# Altium PCB SensorPCB.PcbDoc
Units mil, origin at the board's own origin, x right, y up, seen from the top; angles counter-clockwise.
Board outline 3630 x 1710 mil, 2 copper layers (Top Layer, Bottom Layer); 23 components, 20 nets, 75 pads, 30 vias.
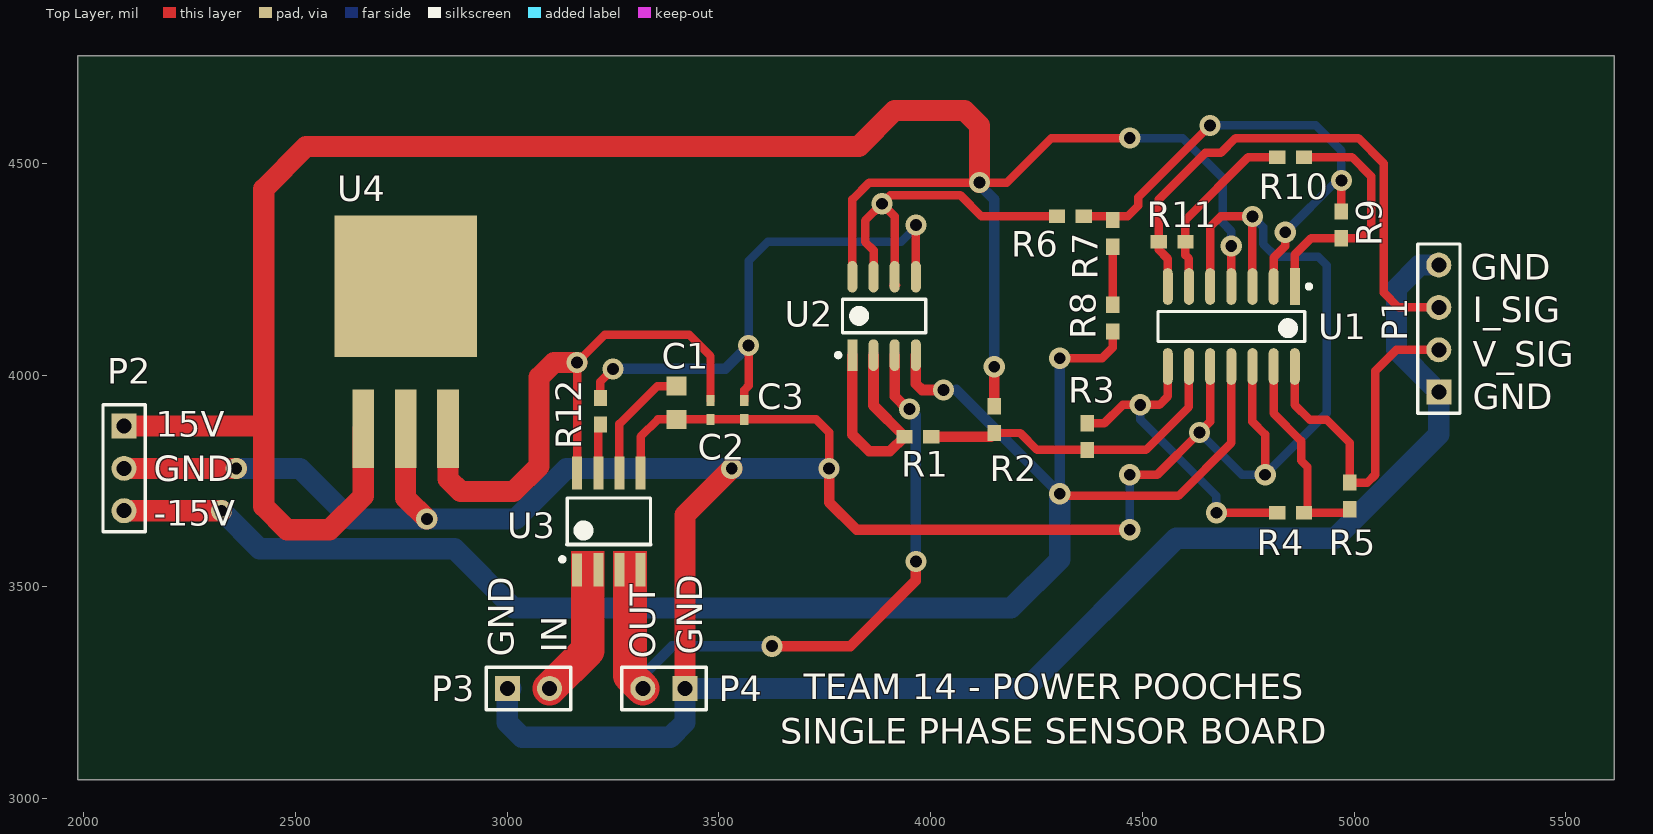
[diagram p0: Top Layer view]
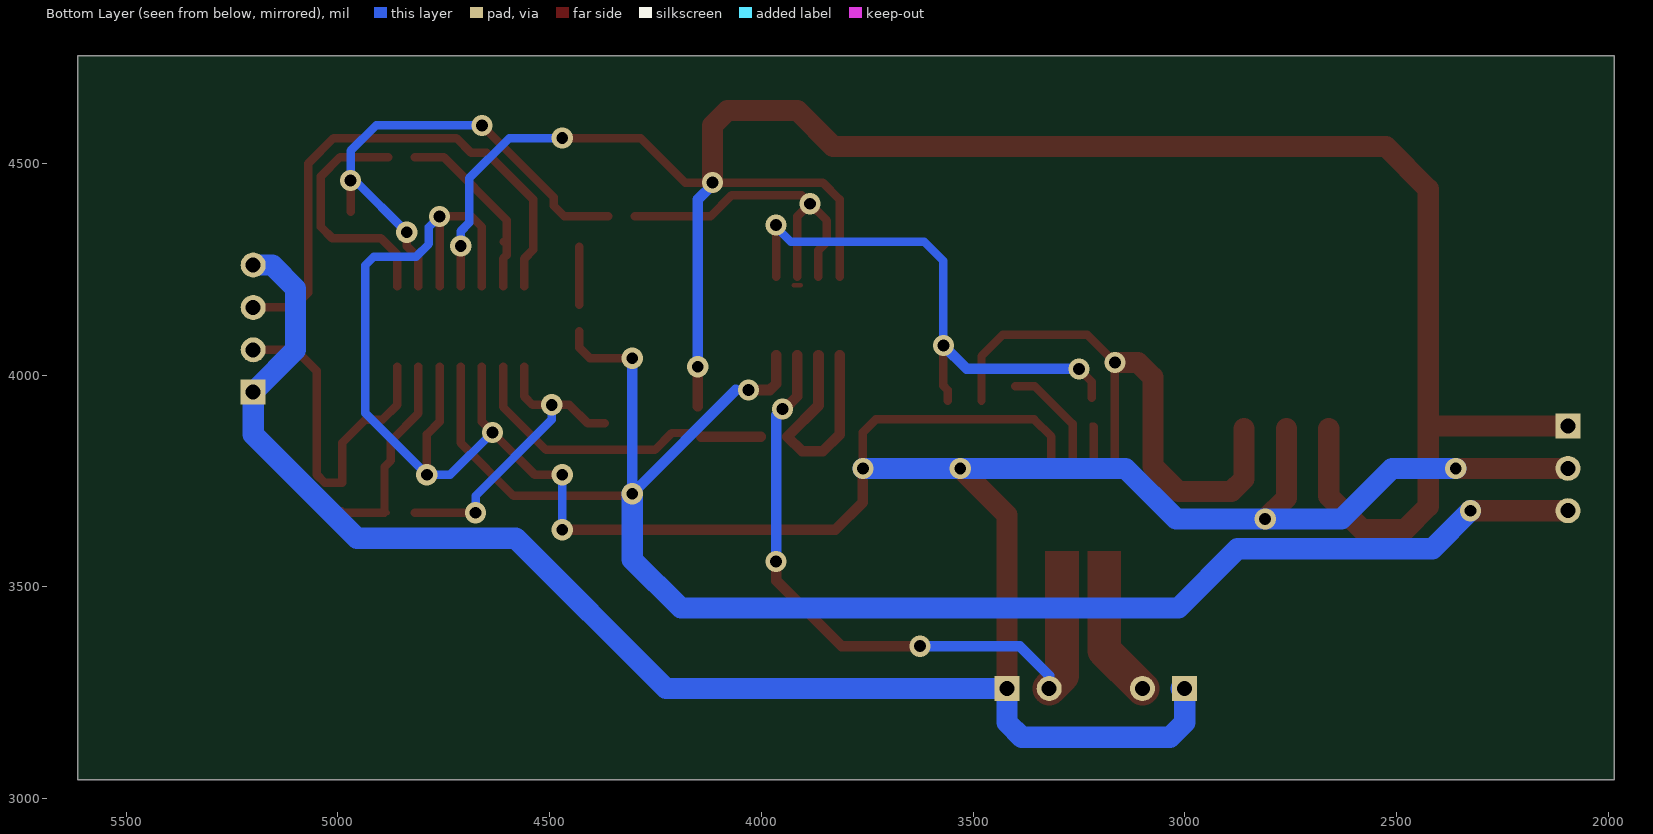
[diagram p1: Bottom Layer view, seen from below]

## Layer stack, top to bottom
Top Layer: signal copper 1.4
Dielectric: dielectric 12.6, FR-4, Dk 4.8
Bottom Layer: signal copper 1.4

## Board outline
1985,3045 5615,3045 5615,4755 1985,4755

## Design rules (kind name [scope] priority, off if disabled: settings)
Clearance [All] p1: gap=10
PolygonConnect [All] p1: connectstyle=Relief reliefconductorwidth=10 reliefentries=4 polygonreliefangle="90 Angle"
RoutingVias [All] p1: holewidth=28 width=50 viastyle="Through Hole" minholewidth=28 minwidth=50 maxholewidth=28 maxwidth=50
SilkscreenOverComponentPads [All] p1: minsilkscreentomaskgap=10
SolderMaskExpansion [All] p1: expansion=4
Width [All] p1: maxlimit=100 minlimit=10 preferedwidth=50
27 further rules are at their usual default settings.

## Components (designator, comment, footprint, x,y, rotation, side; value= is the part's Value field where it differs from the comment)
C1 "Cap Semi" CAP0805 3400,3935 r270 top
C2 "Cap Semi" CAP0402 3480,3920 r90 top
C3 "Cap Semi" CAP0402 3560,3920 r90 top
P1 "Header 4" HDR1X4 5200,3960 r90 top
P2 "Header 3" HDR1X3 2095,3880 r270 top
P3 "Header 2" HDR1X2 3000,3260 r0 top
P4 "Header 2" HDR1X2 3420,3260 r180 top
R1 "Res3" RESC1608X06N 3970,3855 r0 top
R2 "Res3" RESC1608X06N 4150,3895 r270 top
R3 "Res3" RESC1608X06N 4370,3855 r90 top
R4 "Res3" RESC1608X06N 4850,3675 r0 top
R5 "Res3" RESC1608X06N 4990,3715 r90 top
R6 "Res3" RESC1608X06N 4330,4375 r0 top
R7 "Res3" RESC1608X06N 4430,4335 r90 top
R8 "Res3" RESC1608X06N 4430,4135 r90 top
R9 "Res3" RESC1608X06N 4970,4355 r270 top
R10 "Res3" RESC1608X06N 4850,4515 r180 top
R11 "Res3" RESC1608X06N 4570,4315 r180 top
R12 "Res3" RESC1608X06N 3220,3915 r90 top
U1 "TL084D" D014_N 4710,4115 r270 top
U2 "TL082D" D008_L 3890,4140 r90 top
U3 "ACS712" SOIC127P620X175-8N 3240,3655 r90 top
U4 "LM2937-5.0" TO254P1258X464-4N 2760,4080 r90 top

## Footprints (in the part's own frame and the unit in brackets; to place one, negate y for a bottom-side part, rotate by r counter-clockwise, add the part's x,y. Pads: shape width x height; smd on the part's side, far side on the other; paste and mask are expansions set on the pad)
CAP0402 [mm] "Chip Capacitor 2-Leads, Body 1mm x .5mm, IPC Medium Density"
  rect 0.65x0.5 smd: 1(-0.635,0) 2(0.508,0)
CAP0805 [mm] "Chip Capacitor, 2-Leads, Body 2x1.25mm, IPC Medium Density"
  rect 1.14x1.2 smd: 1(-1,0) 2(1,0)
D008_L [mm] "SOIC, 8-Leads, Body 4.9x3.9mm, Pitch 1.27mm, IPC High Density"
  rect 1.9x0.6 smd: 1(-2.35,1.905)
  oval 1.9x0.6 smd: 2(-2.35,0.635) 3(-2.35,-0.635) 4(-2.35,-1.905) 5(2.35,-1.905) 6(2.35,-0.635) 7(2.35,0.635) 8(2.35,1.905)
  silkscreen extent -2.47,-2.5 1,2.88, body extent -2,-2.5 2,2.5, height 1.75
D014_N [mm] "SOIC, 14-Leads, Body 8.7x3.9mm, Pitch 1.27mm, IPC Medium Density"
  rect 2.2x0.6 smd: 1(-2.4,3.81)
  oval 2.2x0.6 smd: 2(-2.4,2.54) 3(-2.4,1.27) 4(-2.4,0) 5(-2.4,-1.27) 6(-2.4,-2.54) 7(-2.4,-3.81) 8(2.4,-3.81) 9(2.4,-2.54) 10(2.4,-1.27) 11(2.4,0) 12(2.4,1.27) 13(2.4,2.54) 14(2.4,3.81)
  silkscreen extent -2.52,-4.4 0.9,4.79, body extent -2,-4.38 2,4.38, height 1.75
HDR1X2 [mm] "Connector; Header; 2 Position"
  rect 1.5x1.5 hole 0.9: 1(0,0)
  round 1.5 hole 0.9: 2(2.54,0)
  silkscreen extent -1.27,-1.27 3.81,1.27
HDR1X3 [mm] "Connector; Header; 3 Position"
  rect 1.5x1.5 hole 0.9: 1(0,0)
  round 1.5 hole 0.9: 2(2.54,0) 3(5.08,0)
  silkscreen extent -1.27,-1.27 6.35,1.27
HDR1X4 [mm] "Connector; Header; 4 Position"
  rect 1.5x1.5 hole 0.9: 1(0,0)
  round 1.5 hole 0.9: 2(2.54,0) 3(5.08,0) 4(7.62,0)
  silkscreen extent -1.27,-1.27 8.89,1.27
RESC1608X06N [mm] "Chip Resistor, 2-Leads, Body 1.6x0.8mm, IPC Medium Density"
  rect 0.97x0.8 smd: 1(-0.8,0) 2(0.8,0)
SOIC127P620X175-8N [mm] "SOIC, 8-Leads, Body 5.0x4.0mm (max), Pitch 1.27mm, IPC Medium Density"
  rect 2x0.6 smd: 1(-2.921,1.905) 2(-2.9,0.635) 3(-2.9,-0.635) 4(-2.9,-1.905) 5(2.9,-1.905) 6(2.9,-0.635) 7(2.9,0.635) 8(2.9,1.905)
  silkscreen extent -2.41,-2.5 1.4,2.92
TO254P1258X464-4N [mm] "TO, 4-Pads, Body 8.9x10.4mm (max), IPC Medium Density"
  rect 4.7x1.3 smd: 1(-5.25,2.54) 2(-5.25,0) 3(-5.25,-2.54)
  rect 8.5x8.55 smd: 4(3.3,0)

## Part data
C1 C2 C3: "Capacitor (Semiconductor SIM Model)"
P1: "Header, 4-Pin"
P2: "Header, 3-Pin"
P3 P4: "Header, 2-Pin"
R1 R2 R3 R4 R5 R6 R7 R8 R9 R10 R11 R12: "Resistor"
U1 U2: "JFET-Input Operational Amplifier"
U4: "5V voltage regulator"

## Via types
v1: diameter 50, hole 28, Top Layer to Bottom Layer, 30 vias

## Nets (pads, with @x,y where several pads share a name; then routed paths per layer and width w, separated by ;. In a path a pad name is that pad's centre, name@x,y a point inside that pad or via, vN(x,y) a via of type N, cw(c..) or ccw(c..) an arc to the next point about the centre after c; other vN are vias at no path point)
5VIN: C2.2 U3.8 U4.3 | length 1413.5
  Top Layer w20: U3.8 v1(3165,4030) 3230,4095 3430,4095 3480,4045 C2.2
  Top Layer w50: U4.3 2860,3755 2890,3725 3015,3725 3075,3785 3075,3995 3110,4030 v1(3165,4030)
-VCC: P2.3 R8.1 U1.11 U2.4 | length 4149.2
  Top Layer w20: v1(4305,4040) 4405,4040 4430,4065 R8.1 ; v1@4310,3715 4585,3715 4710,3840 U1.11
  Top Layer w25: U2.4 3965,3980 3980,3965 v1(4030,3965)
  Top Layer w50: P2.3 v1(2325,3680)
  Bottom Layer w20: v1(4030,3965) 4060,3965
  Bottom Layer w25: 4060,3965 v1(4305,3720) v1(4305,4040)
  Bottom Layer w50: v1(2325,3680) 2415,3590 2875,3590 3015,3450 4190,3450 4305,3565 v1(4305,3720)
GND: C1.2 C2.1 C3.1 P1.1 P1.4 P2.2 P3.1 P4.1 U1.3 U1.5 U1.10 U1.12 U3.5 U4.2 | length 9392.9
  Top Layer w20: U3.5 3315,3855 3355.63,3895.63 C1.2 3729.69,3895.63 3760,3865.32 v1(3760,3780) ; v1(4470,3765) 4535,3765 v1(4635,3865) 4660,3890 U1.10 ; U1.5 4660,4350 4685,4375 v1(4760,4375) U1.3 U1.3@4760,4243.37 ; U1.12 4760,3890 4790,3860 v1(4790,3765)
  Top Layer w25: v1(3760,3780) 3760,3700 3825,3635 v1(4470,3635)
  Top Layer w50: P2.2 v1(2360,3780) ; U4.2 2760,3710 v1(2810,3660) ; P4.1 3420,3670 v1(3530,3780)
  Bottom Layer w20: v1(4470,3635) v1(4470,3765) ; v1(4635,3865) 4735,3765 v1(4790,3765) 4935,3910 4935,4260 4915,4280 4815,4280 4785,4310 4785,4350 v1(4760,4375)
  Bottom Layer w50: v1(2360,3780) 2510,3780 2630,3660 v1(2810,3660) 3020,3660 3140,3780 v1(3530,3780) v1(3760,3780) ; P3.1@3008.74,3260 P3.1 3000,3180 3035,3145 3385,3145 3420,3180 P4.1 4225,3260 4580,3615 4955,3615 5200,3860 P1.1 ; P1.1@5195,3965 5100,4060 5100,4205 5155,4260 P1.4
GRIDVOLTAGEA: P4.2 U2.3 U3.3 U3.4 | length 1473.8
  Top Layer w20: U3.4@3310,3535.83 U3.4
  Top Layer w25: v1(3625,3360) 3810,3360 3965,3515 v1(3965,3560) ; U2.3 3915,3950 v1@3945,3920
  Top Layer w80: 3290,3395 3290,3290 P4.2
  Bottom Layer w25: P4.2 3320,3290 3390,3360 v1(3625,3360) ; v1(3950,3920) 3965,3905 v1(3965,3560)
I_OUT: P1.3 R11.2 U1.7 | length 1280.3
  Top Layer w20: U1.7 4560,4275 4538.5,4296.5 R11.2 4538.5,4415 4648.5,4525 4685,4525 4720,4560 5010,4560 5070,4500 5070,4195 5105,4160 P1.3
NetC1_1: C1.1 U3.6 | length 287.8
  Top Layer w20: U3.6 3265,3885 3354.37,3974.37 C1.1
NetC3_2: C3.2 R12.2 U2.5 | length 1320.5
  Top Layer w10: U2.5@3960,4237.52 U2.5
  Top Layer w20: R12.2 3220,3985 v1(3250,4015) ; C3.2 3560,3965 3570,3975 v1(3570,4070) ; U2.5 v1(3965,4355)
  Bottom Layer w10: v1@3965,4350 v1(3965,4355)
  Bottom Layer w20: v1(3570,4070) 3570,4270 3615,4315 3930,4315 v1@3965,4350
  Bottom Layer w25: v1(3250,4015) 3515,4015 v1(3570,4070)
NetP3_2: P3.2 U3.1 U3.2 | length 172.3
  Top Layer w80: P3.2 3190,3350 3190,3395
NetR1_1: R1.1 U2.1 U2.2 | length 560
  Top Layer w25: U2.1 3815,3860 3855,3820 3903.5,3820 R1.1 ; U2.2 3865,3928.5 R1.1@3935,3858.5
NetR1_2: R1.2 R2.2 R3.1 U1.9 | length 754.1
  Top Layer w20: R2.2 4211.5,3863.5 4251.5,3823.5 4410,3823.5 4508.5,3823.5 4610,3925 U1.9
  Top Layer w25: R1.2 R2.2@4141.5,3855
NetR3_2: R3.2 R4.1 U1.8 | length 759.9
  Top Layer w20: R3.2 4410,3886.5 4453.5,3930 v1(4495,3930) 4540,3930 4560,3950 U1.8 ; v1(4675,3675) R4.1
  Bottom Layer w20: v1(4495,3930) 4495,3895 4675,3715 v1(4675,3675)
NetR4_2: R4.2 R5.1 U1.13 | length 490.7
  Top Layer w10: R4.2 R4.2@4890,3675 ; R5.1@4981.5,3675 R5.1
  Top Layer w20: U1.13 4810,3910 4875,3845 4875,3798.5 4890,3783.5 4890,3675 R5.1@4981.5,3675
NetR6_1: R6.1 U2.6 U2.7 | length 841.3
  Top Layer w10: U2.6@3906.72,4212.52 U2.6@3923.28,4212.52
  Top Layer w20: U2.7 3865,4295 3845,4315 3845,4365 v1(3885,4405) ; U2.6 3915,4375 v1(3885,4405) ; R6.1 4120,4375 4070,4425 3905,4425 v1(3885,4405)
NetR6_2: R6.2 R7.2 R9.1 U1.2 | length 1200.3
  Top Layer w20: R6.2 4465,4375 4490,4400 4490,4420 v1(4660,4590) ; U1.2 4810,4277.43 4837.57,4305 v1(4837.57,4337.57) ; R9.1 v1(4970,4460)
  Bottom Layer w20: v1(4660,4590) 4910,4590 4970,4530 v1(4970,4460) 4960,4460 v1(4837.57,4337.57)
NetR7_1: R7.1 R8.2 | length 137
  Top Layer w20: R8.2 R7.1
NetR9_2: R9.2 R10.1 U1.1 | length 579.6
  Top Layer w20: U1.1 4860,4285 4898.5,4323.5 R9.2 5013.5,4323.5 5040,4350 5040,4470 4995,4515 R10.1
NetR10_2: R10.2 R11.1 U1.6 | length 445.7
  Top Layer w20: R11.1@4608.17,4315 R11.1 ; U1.6 4610,4275 4601.5,4283.5 R11.1 ; R10.2 4750,4515 4601.5,4366.5 R11.1
NetR12_1: R12.1 U3.7 | length 116.4
  Top Layer w10: R12.1@3215,3878.5 R12.1
  Top Layer w20: U3.7 R12.1@3215,3878.5
V_OUT: P1.2 R5.2 U1.14 | length 834.7
  Top Layer w20: U1.14 4860,3930 4895,3895 4935,3895 4990,3840 R5.2 5031.5,3746.5 5050,3765 5050,4010 5100,4060 P1.2
VCC: P2.1 R2.1 U1.4 U2.8 U4.1 | length 5404
  Top Layer w20: U2.8 3815,4415 3855,4455 v1(4115,4455) 4180,4455 4285,4560 v1(4470,4560) ; U1.4 v1(4710,4305)
  Top Layer w25: R2.1 v1(4150,4020)
  Top Layer w50: P2.1 2425,3880 ; U4.1 2660,3715 2580,3635 2480,3635 2425,3690 2425,3880 ; v1(4115,4455) 4115,4590 4080,4625 3915,4625 3830,4540 2525,4540 2425,4440 2425,3880
  Bottom Layer w20: v1(4470,4560) 4595,4560 4690,4465 4690,4360 4710,4340 v1(4710,4305)
  Bottom Layer w25: v1@4115,4450 4150,4415 v1(4150,4020)
pads on no net: U4.4

## Other copper
Top Layer:
  rectangle net NetP3_2: 3150,3375 3230,3585
  rectangle net GRIDVOLTAGEA: 3250,3375 3330,3585

## Silkscreen, mask and mechanical layers (free items; w line width, h text height)
Top Overlay:
  text "GND" at 5275,4225 h60
  text "I_SIG" at 5280,4125 h60
  text "V_SIG" at 5280,4020 h60
  text "GND" at 5280,3920 h60
  text "15V" at 2170,3855 h60
  text "GND" at 2165,3750 h60
  text "-15V" at 2165,3645 h60
  text "IN" at 3140,3345 h60 r90
  text "GND" at 3460,3340 h60 r90
  text "GND" at 3015,3335 h60 r90
  text "OUT" at 3350,3330 h60 r90
  text "TEAM 14 - POWER POOCHES" at 3700,3235 h60
  text "SINGLE PHASE SENSOR BOARD" at 3645,3130 h60
Mechanical 1:
  lines w10: 5580,4720 5580,3075 2015,3075 2015,4720 5585,4720